# Altium PCB photoDetector.PcbDoc
Units mil, origin at the board's own origin, x right, y up, seen from the top; angles counter-clockwise.
Board outline 7322.83 x 5039.37 mil, 2 copper layers (Top Layer, Top, Bottom Layer, Bottom); 15 components, 12 nets, 47 pads, 0 vias.
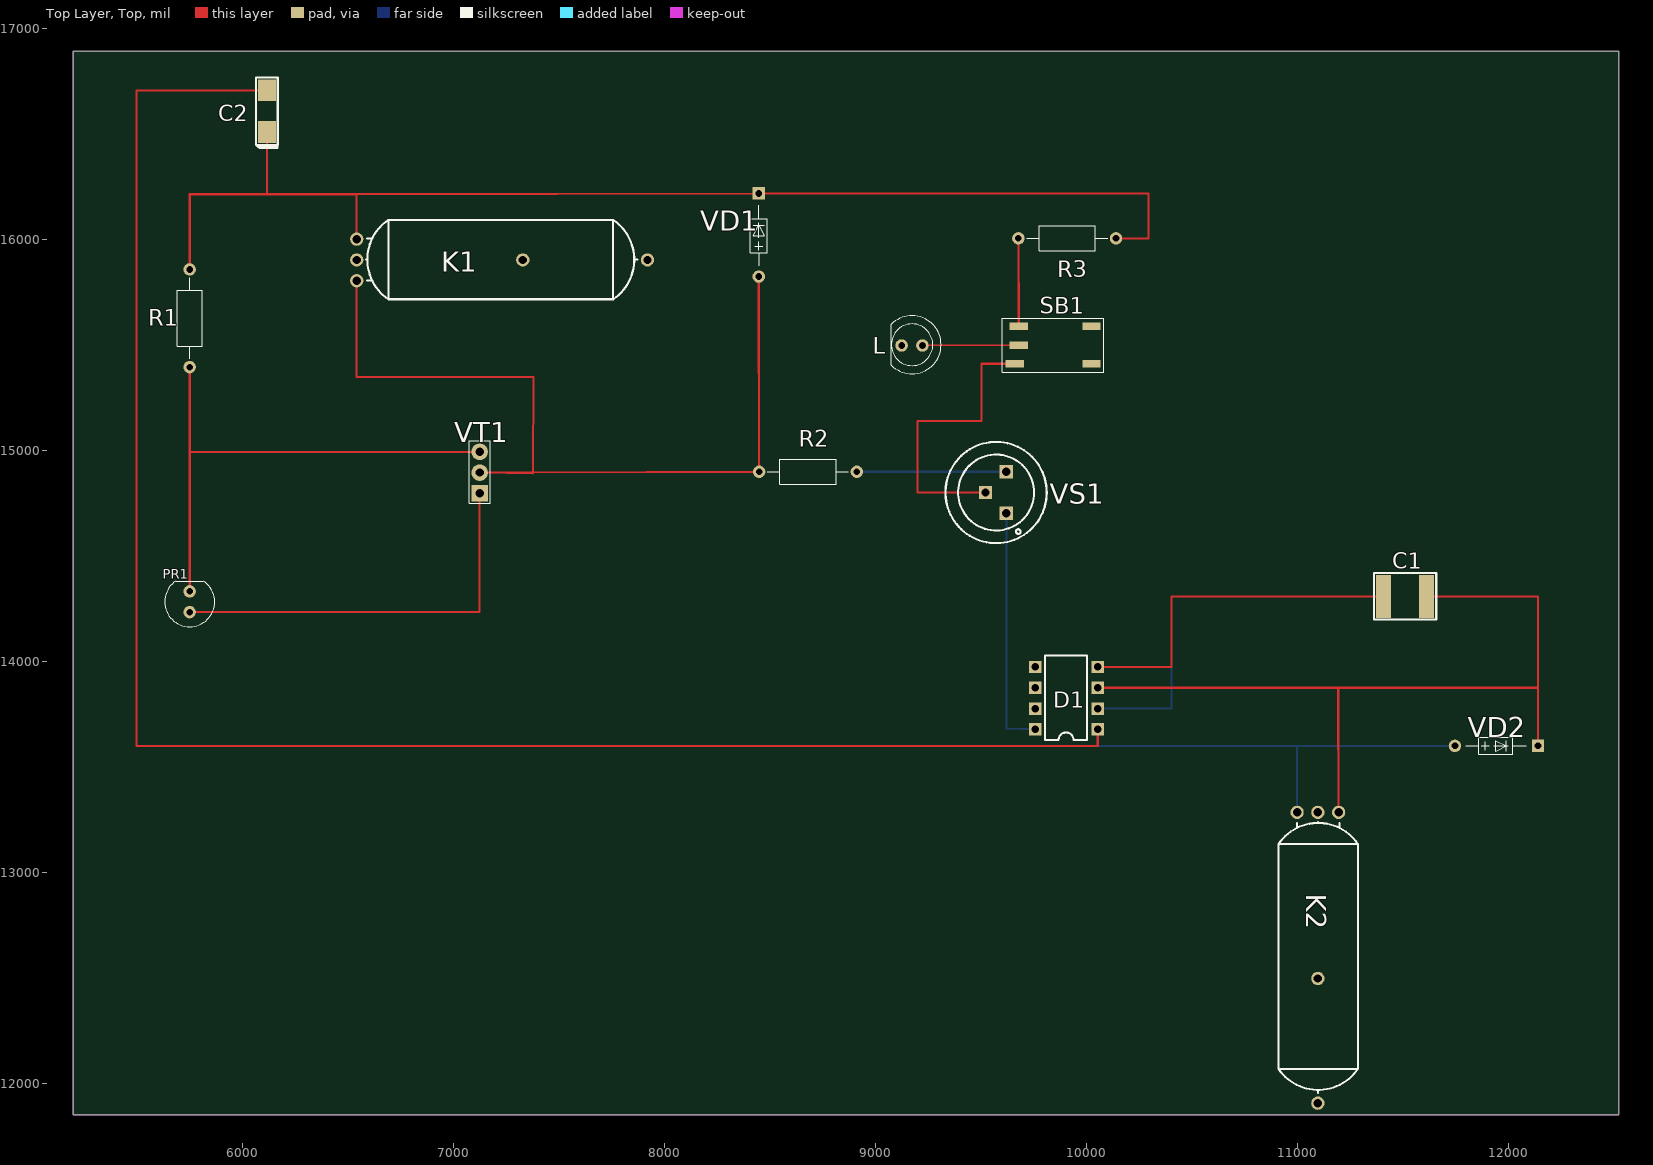
[diagram p0: Top Layer, Top view]
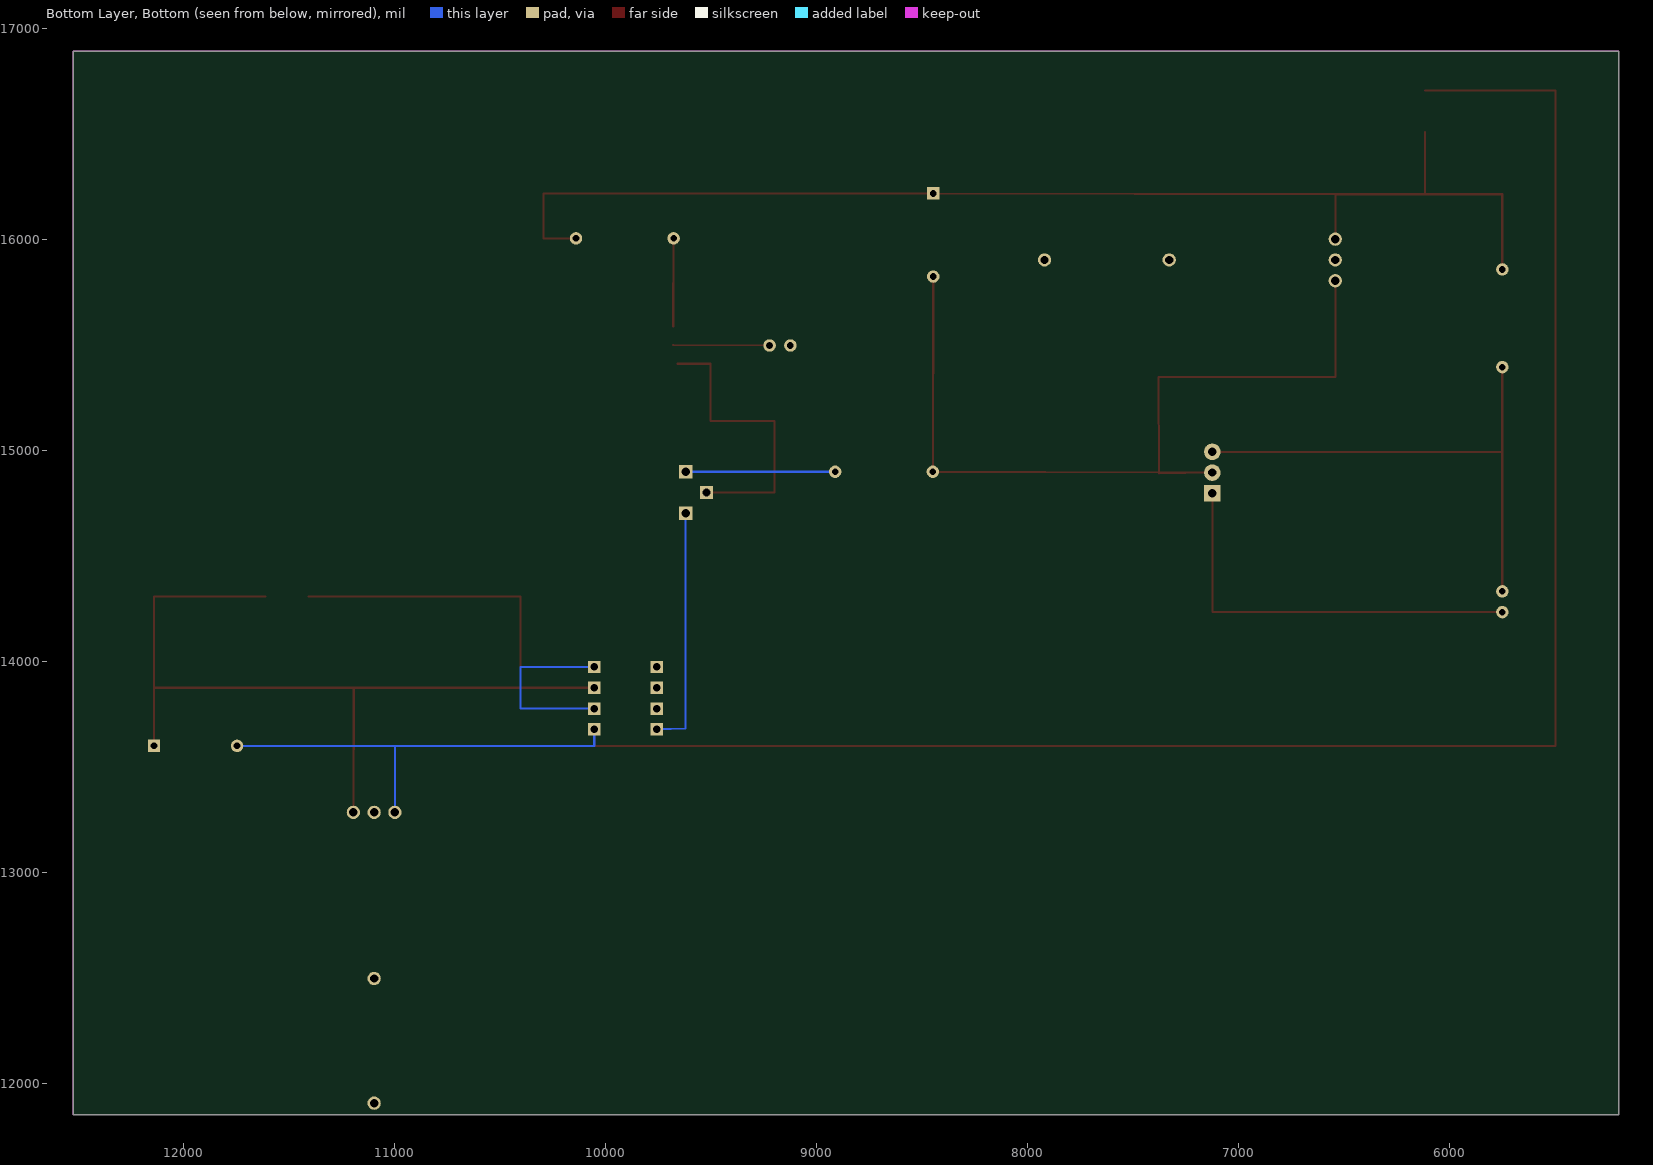
[diagram p1: Bottom Layer, Bottom view, seen from below]

## Layer stack, top to bottom
Top Solder, Top Mask: solder mask 0.4, Solder Resist, Dk 3.5
Top Layer, Top: signal copper 1.4
Dielectric 1: dielectric 12.6, FR-4, Dk 4.8
Bottom Layer, Bottom: signal copper 1.4
Bottom Solder, Bot Mask: solder mask 0.4, Solder Resist, Dk 3.5

## Board outline
5196.85,16889.76 5196.85,11889.76 5196.85,11850.39 12519.68,11850.39 12519.68,16889.76

## Design rules (kind name [scope] priority, off if disabled: settings)
Clearance [All] p1: gap=10 ignorepadtopadclearanceinfootprint=FALSE except(0: Arc-Hole Track-Hole SMDPad-Hole THPad-Hole Via-Hole Fill-Hole Poly-Hole Region-Hole Text-Hole; 11.81: Arc-Arc Arc-Track Arc-THPad Arc-Via Track-Track Track-THPad Track-Via THPad-THPad THPad-Via Via-Via)
PlaneClearance [All] p1: clearance=10
PolygonConnect [All] p1: connectstyle=Relief reliefconductorwidth=10 reliefentries=4 polygonreliefangle="90 Angle" airgapwidth=10
RoutingVias [All] p1: holewidth=28 width=50 viastyle="Through Hole" minholewidth=28 minwidth=50 maxholewidth=28 maxwidth=50
SolderMaskExpansion [All] p1: expansion=4 istentingtop=FALSE
Width [All] p1: maxlimit=10 minlimit=10 preferedwidth=10
29 further rules are at their usual default settings.

## Components (designator, comment, footprint, x,y, rotation, side; value= is the part's Value field where it differs from the comment)
C1 "0,47mk" CC2220 11507.87,14307.09 r0 top
C2 "100k" CE6032_C 6114.17,16606.3 r90 top
D1 "" DIP8 10051.18,13677.17 r180 top
K1 "" RES64 6539.37,15803.15 r0 top
K2 "" RES64 10996.06,13283.46 r270 top
L "" LED-5MM 9220.47,15496.06 r90 top
PR1 "" L-53P3C_L-53P3C(Primary) 5748.03,14330.71 r0 top
R1 "100k" C2-33H-0.25W 5748.03,15393.7 r90 top
R2 "" C2-33H-0.25W 8909.45,14897.64 r180 top
R3 "10" C2-33H-0.25W 10137.8,16003.94 r180 top
SB1 "" CB-6600 9657.48,15409.45 r0 top
VD1 "" КД521(522)_КД521Б(Primary) 8444.88,16216.54 r90 top
VD2 "" КД521(522)_КД521Б(Primary) 12137.8,13598.43 r0 top
VS1 "" KU101 9519.68,14799.21 r270 top
VT1 "" KT13_КТ315Б(Primary) 7122.05,14795.28 r0 top

## Footprints (in the part's own frame and the unit in brackets; to place one, negate y for a bottom-side part, rotate by r counter-clockwise, add the part's x,y. Pads: shape width x height; smd on the part's side, far side on the other; paste and mask are expansions set on the pad)
C2-33H-0.25W [mm]
  round 1.5 hole 0.8: 1(0,0) 2(11.75,0)
  silkscreen extent 1,-1.5 10.75,1.5
CB-6600 [mm]
  rect 2.2x0.9 smd: 1(0,0) 2(9.25,0) 3(0.5,4.5) 4(9.25,4.5) 5(0.5,2.25)
  silkscreen extent -1.5,-1 10.75,5.5
CC2220 [mm]
  rect 1.8x5.2 smd: 1(-2.6,0) 2(2.6,0)
  silkscreen extent -3.75,-2.8 3.75,2.8
CE6032_C [mm]
  rect 2.6x2.2 smd: 1(-2.5,0) 2(2.5,0)
  silkscreen extent -4.44,-1.3 4.05,1.3
DIP8 [mm]
  rect 1.5x1.5 hole 0.9: 1(0,0) 2(0,-2.5) 3(0,-5) 4(0,-7.5) 5(7.5,-7.5) 6(7.5,-5) 7(7.5,-2.5) 8(7.5,0)
  silkscreen extent 1.27,-8.89 6.35,1.28
KT13_КТ315Б(Primary) [mm]
  rect 2x2 hole 1: 1(0,0)
  round 2 hole 1: 2(0,5) 3(0,2.5)
  silkscreen extent -1.25,-1.17 1.25,6.33
KU101 [mm]
  rect 1.6x1.6 hole 1: 1(0,0) 2(2.5,2.5) 3(-2.5,2.5)
  silkscreen extent -6.1,-4.82 6.1,7.37
L-53P3C_L-53P3C(Primary) [mm]
  round 1.5 hole 0.8: E(0,-2.5) K(0,0)
  silkscreen extent -3,-4.25 3,1.25
LED-5MM [mm]
  round 1.5 hole 0.8: 1(0,0) 2(0,2.5)
  silkscreen extent -3.41,-2.25 3.59,3.75
RES64 [mm]
  round 1.6 hole 1: 1(0,0) 2(0,5) 3(0,2.5) 4(35,2.5) 5(20,2.5)
  silkscreen extent 1.14,-2.24 33.78,7.32
КД521(522)_КД521Б(Primary) [mm]
  round 1.5 hole 0.8: 1(-10,0)
  rect 1.5x1.5 hole 0.8: 2(0,0)
  silkscreen extent -8.71,-1.02 -1.4,1.02

## Nets (pads, with @x,y where several pads share a name; then routed paths per layer and width w, separated by ;. In a path a pad name is that pad's centre, name@x,y a point inside that pad or via, vN(x,y) a via of type N, cw(c..) or ccw(c..) an arc to the next point about the centre after c; other vN are vias at no path point)
+12B: C2.1 K1.2 R1.2 R3.1 VD1.2 | length 5773.6
  Top Layer, Top w10: R1.2 5748.03,16212.6 6114.17,16212.6 ; C2.1 6114.17,16212.6 ; K1.2 6539.37,16212.6 ; R3.1 10291.34,16003.94 10291.34,16216.54 VD1.2 6539.37,16212.6 ; 6114.17,16212.6 6539.37,16212.6
KORPUS: C2.2 D1.1 K2.1 VD2.1 | length 10444.9
  Top Layer, Top w10: C2.2 5496.06,16704.72 5496.06,13598.43 10051.18,13598.43 D1.1
  Bottom Layer, Bottom w10: D1.1 10051.18,13598.43 10996.06,13598.43 ; K2.1 10996.06,13598.43 ; VD2.1 10996.06,13598.43
NET00000: PR1.K R1.1 VT1.2 | length 2437
  Top Layer, Top w10: PR1.K 5748.03,14992.13 ; R1.1 5748.03,14992.13 ; VT1.2 5748.03,14992.13
NET00001: PR1.E VT1.1 | length 1937
  Top Layer, Top w10: PR1.E 7122.05,14232.28 VT1.1
NET00003: R3.2 SB1.3 | length 417.3
  Top Layer, Top w10: R3.2 SB1.3
NET00004: L.1 SB1.5 | length 456.7
  Top Layer, Top w10: L.1 SB1.5
NET00005: SB1.1 VS1.1 | length 1393.7
  Top Layer, Top w10: VS1.1 9196.85,14799.21 9196.85,15137.8 9500,15137.8 9500,15409.45 SB1.1
NET00006: R2.1 VS1.3 | length 708.7
  Bottom Layer, Bottom w10: R2.1 VS1.3
NET00007: K1.1 R2.2 VD1.1 VT1.3 | length 4254
  Top Layer, Top w10: K1.1 6539.37,15346.46 7377.95,15346.46 7374.06,14894.45 ; VD1.1 R2.2 7374.06,14894.45 ; 7374.06,14894.45 VT1.3 7374.02,14889.76 7374.06,14894.45
NET00008: D1.8 VS1.2 | length 1157.5
  Bottom Layer, Bottom w10: VS1.2 9618.11,13681.1 D1.8
NET00009: C1.1 D1.2 D1.4 | length 2586.6
  Top Layer, Top w10: D1.4 10401.57,13972.44 10401.57,14307.09 C1.1
  Bottom Layer, Bottom w10: D1.2 10401.57,13775.59 10401.57,13972.44 D1.4
NET00010: C1.2 D1.3 K2.2 VD2.2 | length 4507.9
  Top Layer, Top w10: D1.3 11188.98,13874.02 ; C1.2 12137.8,14307.09 12137.8,13874.02 ; VD2.2 12137.8,13874.02 ; 11188.98,13874.02 12137.8,13874.02 ; 11188.98,13874.02 K2.2 11192.91,13874.02 11188.98,13874.02
pads on no net: D1.5 D1.6 D1.7 K1.3 K1.4 K1.5 K2.3 K2.4 K2.5 L.2 SB1.2 SB1.4

## Keep-outs
Keep-Out Layer, Board:
  the board outline again, w5

## Text inside footprints (layer, text, board x,y; h text height)
L: Mechanical 1, Top Assy "A" at 9236.22,15535.43 h24.61 r90
VT1: Mechanical 1, Top Assy "Б" at 7033.46,14975.59 h39.37; Mechanical 1, Top Assy "К" at 7033.46,14877.17 h39.37; Mechanical 1, Top Assy "Э" at 7033.46,14768.9 h39.37